# Altium PCB PCB1.PcbDoc (part 2 of 3)
Units mm, origin at the board's own origin, x right, y up, seen from the top; angles counter-clockwise.
Board outline 312.67 x 198.63 mm, 2 copper layers (Top Layer, Bottom Layer); 142 components, 324 nets, 969 pads, 386 vias.
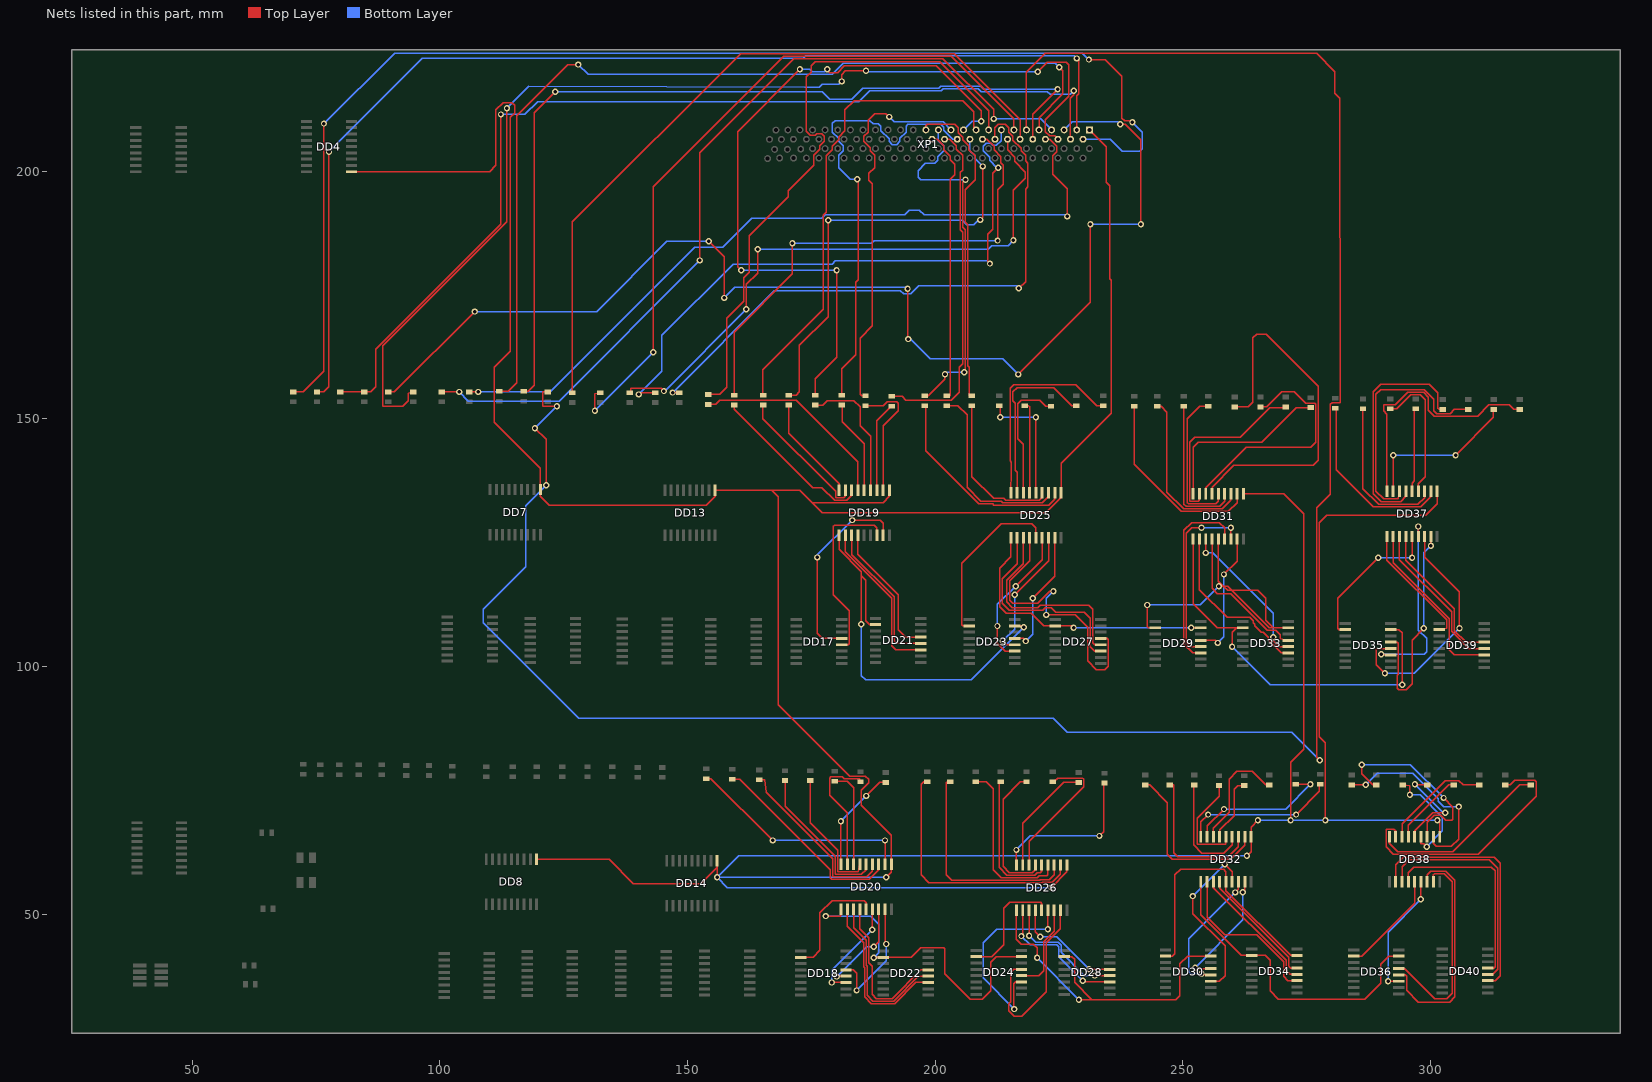
[diagram p2: the nets of this part, all layers, seen from the top]

## Via types
v1: diameter 1.27, hole 0.711, Top Layer to Bottom Layer, 386 vias

## Nets (pads, with @x,y where several pads share a name; then routed paths per layer and width w, separated by ;. In a path a pad name is that pad's centre, name@x,y a point inside that pad or via, vN(x,y) a via of type N, cw(c..) or ccw(c..) an arc to the next point about the centre after c; other vN are vias at no path point) (continued)
NetDD17_12: DD17.12 DD19.7 | length 37.3
  Top Layer w0.254: DD17.12@181.102,104.394 182.423,104.394 182.651,104.623 182.651,111.252 179.4,114.503 179.4,128.27 179.68,128.549 187.678,128.549 188.211,128.016 DD19.7@188.211,126.514
NetDD17_13: DD17.13 DD19.8 | length 40
  Top Layer w0.254: v1(176.2,122.022) 176.2,106.68 177.216,105.664 DD17.13@181.102,105.664 ; v1(183.236,129.565) 183.286,129.515 188.9,129.515 189.481,128.933 DD19.8@189.481,126.514
  Bottom Layer w0.254: v1(176.2,122.022) 176.2,122.53 v1(183.236,129.565)
NetDD18_2: DD18.2 DD20.5 | length 24
  Top Layer w0.254: DD18.2@172.847,41.275 175.336,41.275 176.733,42.672 176.733,50.292 179.172,52.73 185.674,52.73 186.058,52.346 DD20.5@186.058,50.949
NetDD18_11: DD18.11 DD20.6 | length 21.1
  Top Layer w0.254: v1(179.099,36.195) DD18.11@181.997,36.195 ; v1(187.274,46.838) 187.328,46.891 DD20.6@187.328,50.949
  Bottom Layer w0.254: v1(179.099,36.195) 179.099,38.663 v1(187.274,46.838)
NetDD18_12: DD18.12 DD20.7 | length 19.8
  Top Layer w0.254: v1(180.111,37.389) 180.188,37.465 DD18.12@181.997,37.465 ; v1(187.604,43.434) 188.598,44.428 DD20.7@188.598,50.949
  Bottom Layer w0.254: v1(180.111,37.389) 186.157,43.434 v1(187.604,43.434)
NetDD18_13: DD18.13 DD20.8 | length 24.8
  Top Layer w0.254: DD18.13@181.997,38.735 183.49,38.735 184.125,38.1 v1(184.125,34.595) ; DD20.8@189.868,50.949 189.868,44.218 v1(190.119,43.967)
  Bottom Layer w0.254: v1(184.125,34.595) 190.119,40.589 v1(190.119,43.967)
NetDD19_1: DD19.1 DD21.2 DD23.15 | length 81.5
  Top Layer w0.254: DD19.1@180.591,126.514 180.591,123.678 185.09,119.179 185.09,118.285 ; v1(185.09,108.534) 185.09,118.285 ; DD21.2@187.954,108.458 186.766,108.458 186.004,109.22 186.004,117.37 185.09,118.285 ; DD23.15@216.027,108.204 217.653,108.204 v1(217.907,107.95)
  Bottom Layer w0.254: v1(185.09,108.534) 185.09,98.136 185.936,97.29 207.247,97.29 v1(217.907,107.95)
NetDD19_2: DD19.2 DD21.11 | length 32.4
  Top Layer w0.254: DD19.2@181.861,126.514 181.861,123.121 191.182,113.8 191.182,104.22 192.024,103.378 DD21.11@197.104,103.378
NetDD19_3: DD19.3 DD21.12 | length 30.5
  Top Layer w0.254: DD19.3@183.131,126.514 183.131,122.607 191.694,114.045 191.694,105.156 192.202,104.648 DD21.12@197.104,104.648
NetDD19_4: DD19.4 DD21.13 | length 27.6
  Top Layer w0.254: DD19.4@184.401,126.514 184.401,122.645 192.532,114.514 192.532,107.442 194.056,105.918 DD21.13@197.104,105.918
NetDD19_11: DD19.11 R35.1 | length 25.8
  Top Layer w0.254: R35.1@185.925,152.67 189.543,152.67 190.289,153.416 192.278,153.416 192.532,153.162 192.532,151.638 189.481,148.587 DD19.11@189.481,135.614
NetDD19_12: DD19.12 R37.1 | length 18.3
  Top Layer w0.254: DD19.12@188.211,135.614 188.211,149.619 191.135,152.543 R37.1@191.259,152.543
NetDD19_13: DD19.13 R39.1 | length 27.6
  Top Layer w0.254: R39.1@175.765,152.797 177.292,152.797 178.165,153.67 183.591,153.67 184.861,152.4 184.861,148.565 186.941,146.485 DD19.13@186.941,135.614
NetDD19_14: DD19.14 R41.1 | length 19.2
  Top Layer w0.254: R41.1@181.099,152.797 181.28,152.797 181.28,149.377 185.671,144.986 DD19.14@185.671,135.614
NetDD19_15: DD19.15 R43.1 | length 41.5
  Top Layer w0.254: R43.1@154.175,152.924 155.642,152.924 156.515,153.797 171.933,153.797 184.401,141.329 DD19.15@184.401,135.614
NetDD19_16: DD19.16 R45.1 | length 33.6
  Top Layer w0.254: R45.1@159.398,152.797 159.385,152.797 159.385,151.968 175.235,136.119 177.14,136.119 179.676,133.583 182.093,133.583 183.131,134.621 DD19.16@183.131,135.614
NetDD19_17: DD19.17 R47.1 | length 28.1
  Top Layer w0.254: R47.1@165.24,152.797 165.227,152.797 165.227,150.063 179.908,135.382 179.908,134.087 181.582,134.087 181.861,134.366 DD19.17@181.861,135.614
NetDD19_18: DD19.18 R49.1 | length 21.4
  Top Layer w0.254: R49.1@170.431,152.797 170.409,152.797 170.409,147.088 180.591,136.906 DD19.18@180.591,135.614
NetDD20_1: DD20.1 DD22.2 DD24.15 | length 67.8
  Top Layer w0.254: v1(177.902,49.606) 180.978,49.606 DD20.1@180.978,50.949 ; v1(187.604,41.199) 187.681,41.275 DD22.2@189.484,41.275 195.157,41.275 197.104,43.222 201.725,43.222 201.904,43.043 201.904,37.948 207.035,32.817 209.474,32.817 211.201,34.544 211.201,40.259 212.344,41.402 DD24.15@217.43,41.402
  Bottom Layer w0.254: v1(177.902,49.606) 186.944,49.606 188.616,47.934 188.616,42.211 v1(187.604,41.199)
NetDD20_2: DD20.2 DD22.11 | length 34.3
  Top Layer w0.254: DD20.2@182.248,50.949 182.248,47.555 185.584,44.219 185.584,39.345 185.75,39.179 185.75,33.308 187.106,31.952 191.845,31.952 196.088,36.195 DD22.11@198.634,36.195
NetDD20_3: DD20.3 DD22.12 | length 33.4
  Top Layer w0.254: DD20.3@183.518,50.949 183.518,47.293 186.088,44.723 186.088,39.674 186.254,39.508 186.254,33.634 187.431,32.456 191.618,32.456 196.626,37.465 DD22.12@198.634,37.465
NetDD20_4: DD20.4 DD22.13 | length 32.3
  Top Layer w0.254: DD20.4@184.788,50.949 184.788,47.07 186.592,45.265 186.592,40.178 187.262,39.508 187.262,33.828 188.13,32.961 191.33,32.961 197.104,38.735 DD22.13@198.634,38.735
NetDD20_11: DD20.11 R36.1 | length 46
  Top Layer w0.254: R36.1@153.816,77.359 154.721,77.359 v1(167.208,64.872) ; DD20.11@189.868,60.049 v1(189.868,64.872)
  Bottom Layer w0.254: v1(167.208,64.872) v1(189.868,64.872)
NetDD20_12: DD20.12 R38.1 | length 40.9
  Top Layer w0.254: R38.1@159.007,77.232 160.503,77.232 178.777,58.958 178.777,57.303 179.07,57.01 186.679,57.01 188.598,58.929 DD20.12@188.598,60.049
NetDD20_13: DD20.13 R40.1 | length 36.2
  Top Layer w0.254: R40.1@164.468,77.105 165.608,77.105 165.862,74.594 179.281,61.175 179.281,57.514 186.168,57.514 187.328,58.674 DD20.13@187.328,60.049
NetDD20_14: DD20.14 R42.1 | length 30.9
  Top Layer w0.254: R42.1@169.675,76.978 169.697,76.978 169.697,71.801 179.785,61.714 179.785,58.018 185.097,58.018 186.058,58.979 DD20.14@186.058,60.049
NetDD20_15: DD20.15 R44.1 | length 26.5
  Top Layer w0.254: R44.1@174.755,76.978 174.752,76.978 174.752,68.428 180.289,62.89 180.289,58.522 184.437,58.522 DD20.15@184.788,60.049
NetDD20_16: DD20.16 R46.1 | length 19.8
  Top Layer w0.254: R46.1@179.708,76.851 182.202,76.851 183.518,75.535 DD20.16@183.518,60.049
NetDD20_17: DD20.17 R48.1 | length 26.1
  Top Layer w0.254: DD20.17@182.248,60.049 182.248,70.46 178.664,74.044 178.664,77.47 178.918,77.724 181.254,77.724 181.61,77.368 184.734,77.368 184.734,76.724 R48.1@184.915,76.724
NetDD20_18: DD20.18 R50.1 | length 21
  Top Layer w0.254: DD20.18@180.978,60.049 v1(180.978,68.761) ; v1(186.08,73.863) 188.814,76.597 R50.1@189.995,76.597
  Bottom Layer w0.254: v1(180.978,68.761) v1(186.08,73.863)
NetDD23_2: DD23.2 DD25.5 | length 34.7
  Top Layer w0.254: DD23.2@206.877,108.204 205.588,108.204 205.334,108.458 205.334,120.802 213.385,128.854 219.504,128.854 220.342,128.016 DD25.5@220.342,126.006
NetDD23_11: DD23.11 DD25.6 | length 29.2
  Top Layer w0.254: v1(212.573,108.179) 212.573,104.648 214.097,103.124 DD23.11@216.027,103.124 ; v1(216.256,116.23) 221.612,121.587 DD25.6@221.612,126.006
  Bottom Layer w0.254: v1(212.573,108.179) 212.573,112.547 v1(216.256,116.23)
NetDD23_12: DD23.12 DD25.7 | length 27.3
  Top Layer w0.254: v1(213.665,105.156) 214.427,104.394 DD23.12@216.027,104.394 ; v1(216.052,114.503) 222.882,121.333 DD25.7@222.882,126.006
  Bottom Layer w0.254: v1(213.665,105.156) 216.052,107.544 v1(216.052,114.503)
NetDD23_13: DD23.13 DD25.8 | length 25.8
  Top Layer w0.254: DD23.13@216.027,105.664 217.78,105.664 v1(218.313,105.131) ; v1(219.706,113.792) 224.152,118.238 DD25.8@224.152,126.006
  Bottom Layer w0.254: v1(218.313,105.131) 219.706,106.524 v1(219.706,113.792)
NetDD24_2: DD24.2 DD26.5 | length 23.5
  Top Layer w0.254: DD24.2@208.28,41.402 211.404,41.402 213.817,43.815 213.817,51.156 215.011,52.349 221.288,52.349 221.491,52.146 DD26.5@221.491,50.822
NetDD24_11: DD24.11 DD26.6 | length 41
  Top Layer w0.254: v1(215.976,30.836) 215.849,30.963 215.849,35.916 216.256,36.322 DD24.11@217.43,36.322 ; v1(222.761,46.935) DD26.6@222.761,50.822
  Bottom Layer w0.254: v1(215.976,30.836) 209.658,37.154 209.658,44.192 212.401,46.935 v1(222.761,46.935)
NetDD24_12: DD24.12 DD26.7 | length 18
  Top Layer w0.254: DD24.12@217.43,37.592 220.89,37.592 221.906,38.608 221.906,44.408 224.031,46.533 DD26.7@224.031,50.822
NetDD24_13: DD24.13 DD26.8 | length 38.1
  Top Layer w0.254: DD24.13@217.43,38.862 215.9,38.862 215.214,38.176 215.214,32.309 214.859,31.953 214.859,30.48 215.951,29.388 217.5,29.388 222.41,34.298 222.41,44.188 225.301,47.079 DD26.8@225.301,50.822
NetDD25_1: DD25.1 DD27.2 DD29.15 | length 57.2
  Top Layer w0.254: DD25.1@215.262,126.006 215.262,122.123 213.016,119.877 213.016,112.108 214.376,110.748 219.393,110.748 221.937,108.204 DD27.2@224.276,108.204 227.559,108.204 v1(227.94,107.823) ; v1(251.714,107.823) DD29.15@253.619,107.823
  Bottom Layer w0.254: v1(227.94,107.823) v1(251.714,107.823)
NetDD25_2: DD25.2 DD27.11 | length 42.1
  Top Layer w0.254: DD25.2@216.532,126.006 216.532,120.727 213.52,117.715 213.52,112.811 215.003,111.328 221.726,111.328 222.265,111.867 223.41,111.867 224.357,110.92 230.1,110.92 231.292,109.728 231.292,104.038 232.207,103.124 DD27.11@233.426,103.124
NetDD25_3: DD25.3 DD27.12 | length 41.3
  Top Layer w0.254: DD25.3@217.802,126.006 217.802,120.768 214.42,117.385 214.42,113.063 215.581,111.902 220.753,111.902 221.222,112.371 231.015,112.371 231.858,111.527 231.858,104.795 232.259,104.394 DD27.12@233.426,104.394
NetDD25_4: DD25.4 DD27.13 | length 58.3
  Top Layer w0.254: DD25.4@219.072,126.006 219.072,121.325 215.036,117.289 215.036,113.36 215.621,112.776 220.726,112.776 223.164,115.214 v1(223.876,115.214) ; v1(222.402,110.414) 228.321,110.414 230.788,107.946 230.788,101.113 232.562,99.339 234.239,99.339 234.975,100.076 234.975,105.41 234.721,105.664 DD27.13@233.426,105.664
  Bottom Layer w0.254: v1(222.402,110.414) 222.402,113.741 v1(223.876,115.214)
NetDD25_11: DD25.11 R51.1 | length 41.7
  Top Layer w0.254: R51.1@197.863,152.67 198.044,152.67 198.044,143.598 208.788,132.853 211.578,132.853 211.861,132.571 222.918,132.571 224.152,133.804 DD25.11@224.152,135.106
NetDD25_12: DD25.12 R53.1 | length 38.5
  Top Layer w0.254: R53.1@202.308,152.67 204.546,152.67 206.426,150.79 206.426,136.168 209.236,133.358 213.372,133.358 213.654,133.075 221.594,133.075 222.882,134.363 DD25.12@222.882,135.106
NetDD25_13: DD25.13 R55.1 | length 31.7
  Top Layer w0.254: R55.1@207.388,152.67 207.366,152.67 207.366,138.366 211.807,133.924 213.876,133.924 214.221,133.579 221.031,133.579 221.612,134.16 DD25.13@221.612,135.106
NetDD25_14: DD25.14 R57.1 | length 24.9
  Top Layer w0.254: R57.1@212.976,152.67 213.157,152.67 v1(213.157,150.343) ; DD25.14@220.342,135.106 v1(220.342,150.343)
  Bottom Layer w0.254: v1(213.157,150.343) v1(220.342,150.343)
NetDD25_15: DD25.15 R59.1 | length 18.4
  Top Layer w0.254: R59.1@218.056,152.67 218.802,152.67 219.072,152.4 DD25.15@219.072,135.106
NetDD25_16: DD25.16 R61.1 | length 25.9
  Top Layer w0.254: DD25.16@217.802,135.106 217.802,144.834 216.672,145.964 216.672,153.019 217.424,153.772 221.123,153.772 222.352,152.543 R61.1@223.39,152.543
NetDD25_17: DD25.17 R63.1 | length 35.3
  Top Layer w0.254: DD25.17@216.532,135.106 216.532,139.268 216.168,139.633 216.168,153.201 215.675,153.693 215.675,155.431 216.552,156.308 223.946,156.308 227.584,152.67 R63.1@228.47,152.67
NetDD25_18: DD25.18 R65.1 | length 42.1
  Top Layer w0.254: DD25.18@215.262,135.106 215.262,137.223 215.406,137.366 215.406,141.263 215.163,141.505 215.163,156.184 215.9,156.92 228.414,156.92 232.664,152.67 R65.1@233.931,152.67
NetDD26_1: DD26.1 DD28.2 DD30.15 | length 70.7
  Top Layer w0.254: DD26.1@216.411,50.822 216.411,44.958 217.427,43.942 219.812,43.942 220.574,43.18 v1(220.574,41.173) ; DD28.2@226.06,41.402 227.584,41.402 228.147,40.839 228.147,36.216 231.648,32.715 ; v1(229.032,32.715) 231.648,32.715 ; DD30.15@255.657,41.529 250.952,41.529 249.403,39.98 249.403,33.528 248.59,32.715 231.648,32.715
  Bottom Layer w0.254: v1(220.574,41.173) v1(229.032,32.715)
NetDD26_2: DD26.2 DD28.11 | length 28.2
  Top Layer w0.254: v1(217.424,45.568) 217.681,45.825 DD26.2@217.681,50.822 ; v1(229.768,36.547) 229.993,36.322 DD28.11@235.21,36.322
  Bottom Layer w0.254: v1(217.424,45.568) 219.181,43.811 224.561,43.811 224.938,43.434 224.938,41.377 v1(229.768,36.547)
NetDD26_3: DD26.3 DD28.12 | length 25.6
  Top Layer w0.254: v1(218.951,45.641) DD26.3@218.951,50.822 ; v1(232.207,37.592) DD28.12@235.21,37.592
  Bottom Layer w0.254: v1(218.951,45.641) 220.277,44.315 224.815,44.315 225.442,43.688 225.442,42.274 230.124,37.592 v1(232.207,37.592)
NetDD26_4: DD26.4 DD28.13 | length 22.5
  Top Layer w0.254: DD26.4@220.221,50.822 220.221,46.431 v1(221.237,45.415) ; v1(231.064,38.862) DD28.13@235.21,38.862
  Bottom Layer w0.254: v1(221.237,45.415) 224.511,45.415 v1(231.064,38.862)
NetDD26_11: DD26.11 R52.1 | length 51.1
  Top Layer w0.254: R52.1@198.377,76.724 197.663,76.724 197.139,76.2 197.139,57.912 198.673,56.378 221.65,56.378 221.685,56.413 223.647,56.413 225.301,58.067 DD26.11@225.301,59.922
NetDD26_12: DD26.12 R54.1 | length 44.2
  Top Layer w0.254: R54.1@203.076,76.724 202.387,76.724 202.277,76.614 202.277,57.912 203.306,56.882 221.146,56.882 221.185,56.921 223.04,56.921 224.031,57.912 DD26.12@224.031,59.922
NetDD26_13: DD26.13 R56.1 | length 34.4
  Top Layer w0.254: R56.1@208.156,76.724 210.312,76.724 211.76,75.276 211.76,58.928 213.301,57.387 220.642,57.387 220.99,57.734 222.558,57.734 222.761,57.937 DD26.13@222.761,59.922
NetDD26_14: DD26.14 R58.1 | length 28.4
  Top Layer w0.254: R58.1@213.236,76.724 212.903,76.724 212.903,59.436 214.448,57.891 220.142,57.891 220.646,58.395 221.234,58.395 221.491,58.652 DD26.14@221.491,59.922
NetDD26_15: DD26.15 R60.1 | length 28
  Top Layer w0.254: R60.1@218.443,76.724 217.195,76.724 213.716,73.244 213.716,59.639 214.96,58.395 219.634,58.395 220.221,58.982 DD26.15@220.221,59.922
NetDD26_16: DD26.16 R62.1 | length 28.6
  Top Layer w0.254: DD26.16@218.951,59.922 218.951,64.685 230.011,75.745 230.011,77.304 229.845,77.47 224.698,77.47 223.952,76.724 R62.1@223.777,76.724
NetDD26_17: DD26.17 R64.1 | length 23.1
  Top Layer w0.254: DD26.17@217.681,59.922 217.681,68.304 225.974,76.597 R64.1@228.984,76.597
NetDD26_18: DD26.18 R66.1 | length 32.2
  Top Layer w0.254: DD26.18@216.411,59.922 v1(216.411,62.97) ; v1(233.172,65.786) 234.01,66.624 234.01,76.47 R66.1@234.191,76.47
  Bottom Layer w0.254: v1(216.411,62.97) 219.227,65.786 v1(233.172,65.786)
NetDD29_2: DD29.2 DD31.5 DD33.15 | length 65.7
  Top Layer w0.254: v1(242.824,112.42) 242.824,108.077 243.078,107.823 DD29.2@244.469,107.823 ; DD31.5@257.172,125.752 257.172,117.221 258.188,116.205 ; v1(257.302,116.205) 258.188,116.205 ; DD33.15@271.272,107.823 268.224,107.823 ; 258.188,116.205 259.08,116.205 259.92,115.365 ; 258.188,116.205 259.028,115.365 259.92,115.365 ; 259.92,115.365 265.177,115.365 266.751,113.792 266.751,109.296 268.224,107.823 ; 259.92,115.365 267.462,107.823 268.224,107.823
  Bottom Layer w0.254: v1(242.824,112.42) 253.517,112.42 v1(257.302,116.205)
NetDD29_11: DD29.11 DD31.6 | length 38.7
  Top Layer w0.254: DD29.11@253.619,102.743 251.968,102.743 250.19,104.521 250.19,127.483 251.761,129.053 257.405,129.053 258.442,128.016 DD31.6@258.442,125.752
NetDD29_12: DD29.12 DD31.7 | length 37.2
  Top Layer w0.254: DD29.12@253.619,104.013 251.435,104.013 250.698,104.75 250.698,126.924 251.816,128.041 v1(253.771,128.041) ; DD31.7@259.712,125.752 v1(259.712,128.041)
  Bottom Layer w0.254: v1(253.771,128.041) v1(259.712,128.041)
NetDD29_13: DD29.13 DD31.8 | length 26.3
  Top Layer w0.254: DD29.13@253.619,105.283 256.515,105.283 v1(257.048,104.75) ; v1(258.314,118.589) 260.982,121.257 DD31.8@260.982,125.752
  Bottom Layer w0.254: v1(257.048,104.75) 258.314,106.016 v1(258.314,118.589)
NetDD30_2: DD30.2 DD32.5 DD34.15 | length 52.6
  Top Layer w0.254: DD30.2@246.507,41.529 247.904,41.529 248.412,42.037 248.412,57.912 249.559,59.059 258.238,59.059 258.702,58.595 DD32.5@258.702,56.537 258.702,54.745 271.791,41.656 DD34.15@273.056,41.656
NetDD30_11: DD30.11 DD32.6 | length 35.4
  Top Layer w0.254: v1(252.019,53.645) 252.019,50.114 258.547,43.586 258.547,37.592 257.404,36.449 DD30.11@255.657,36.449 ; v1(258.445,60.071) 259.972,58.544 DD32.6@259.972,56.537
  Bottom Layer w0.254: v1(252.019,53.645) v1(258.445,60.071)
NetDD30_12: DD30.12 DD32.7 | length 27
  Top Layer w0.254: v1(253.771,37.973) 254.025,37.719 DD30.12@255.657,37.719 ; v1(260.604,54.378) 261.242,55.016 DD32.7@261.242,56.537
  Bottom Layer w0.254: v1(253.771,37.973) 251.612,37.973 251.231,38.354 251.231,45.006 v1(260.604,54.378)
NetDD30_13: DD30.13 DD32.8 | length 24.7
  Top Layer w0.254: v1(252.501,39.192) 252.705,38.989 DD30.13@255.657,38.989 ; v1(262.128,54.404) 262.512,54.788 DD32.8@262.512,56.537
  Bottom Layer w0.254: v1(252.501,39.192) 262.128,48.819 v1(262.128,54.404)
NetDD31_1: DD31.1 DD33.2 DD35.15 | length 79.9
  Top Layer w0.254: DD31.1@252.092,125.752 252.092,112.703 256.972,107.823 260.858,107.823 ; v1(259.944,104.013) 259.944,106.909 260.858,107.823 ; DD33.2@262.122,107.823 260.858,107.823 ; DD35.15@291.973,107.442 293.624,107.442 294.284,106.782 v1(294.284,96.317)
  Bottom Layer w0.254: v1(259.944,104.013) 267.64,96.317 v1(294.284,96.317)
NetDD31_2: DD31.2 DD33.11 | length 34.1
  Top Layer w0.254: DD31.2@253.362,125.752 253.362,115.478 258.943,109.897 263.534,109.897 264.183,109.248 264.183,108.882 264.503,108.561 264.503,108.24 265.832,106.912 266.245,106.912 267.237,105.92 267.237,105.431 269.926,102.743 DD33.11@271.272,102.743
NetDD31_3: DD31.3 DD33.12 | length 30.6
  Top Layer w0.254: v1(254.632,122.936) DD31.3@254.632,125.752 ; v1(268.249,105.918) 268.249,105.156 269.392,104.013 DD33.12@271.272,104.013
  Bottom Layer w0.254: v1(254.632,122.936) 256.048,122.936 268.249,110.735 v1(268.249,105.918)
NetDD31_4: DD31.4 DD33.13 | length 30
  Top Layer w0.254: DD31.4@255.902,125.752 255.902,115.802 256.972,114.732 259.639,114.732 267.052,107.319 268.732,107.319 269.646,106.405 269.646,105.639 DD33.13@271.272,105.283
NetDD31_11: DD31.11 R67.1 | length 39
  Top Layer w0.254: R67.1@240.154,152.543 240.157,152.543 240.157,140.804 249.657,131.304 259.216,131.304 260.982,133.071 DD31.11@260.982,134.852
NetDD31_12: DD31.12 R69.1 | length 34.9
  Top Layer w0.254: R69.1@244.853,152.543 245.627,152.543 246.786,151.384 246.786,135.183 250.161,131.809 257.945,131.809 259.712,133.576 DD31.12@259.712,134.852
NetDD31_13: DD31.13 R71.1 | length 30.2
  Top Layer w0.254: R71.1@250.187,152.543 250.19,152.543 250.19,132.791 250.669,132.313 257.43,132.313 258.442,133.325 DD31.13@258.442,134.852
NetDD31_14: DD31.14 R73.1 | length 30.3
  Top Layer w0.254: R73.1@255.14,152.543 253.457,152.543 250.901,149.987 250.901,133.096 251.181,132.817 256.664,132.817 257.172,133.325 DD31.14@257.172,134.852
NetDD31_15: DD31.15 R75.1 | length 75
  Top Layer w0.254: DD31.15@255.902,134.852 255.902,136.166 260.325,140.589 276.352,140.589 277.393,141.63 277.393,156.616 266.878,167.132 264.922,167.132 264.16,166.37 264.16,153.407 263.169,152.416 R75.1@260.474,152.416
NetDD31_16: DD31.16 R77.1 | length 48.5
  Top Layer w0.254: DD31.16@254.632,134.852 254.632,136.144 262.76,144.272 275.869,144.272 276.885,145.288 276.885,152.908 276.631,153.162 274.828,153.162 272.542,155.448 269.961,155.448 266.929,152.416 R77.1@265.681,152.416
NetDD31_17: DD31.17 R79.1 | length 37.7
  Top Layer w0.254: DD31.17@253.362,134.852 253.362,133.604 253.083,133.325 251.409,133.325 251.409,145.288 252.425,146.304 261.645,146.304 267.559,152.218 270.238,152.218 270.238,152.416 R79.1@270.761,152.416
NetDD31_18: DD31.18 R81.1 | length 36.5
  Top Layer w0.254: DD31.18@252.092,134.852 252.092,144.272 253.108,145.288 265.922,145.288 272.923,152.289 R81.1@275.841,152.289
NetDD32_1: DD32.1 DD34.2 DD36.15 | length 63.2
  Top Layer w0.254: DD32.1@253.622,56.537 253.622,49.857 261.823,41.656 DD34.2@263.906,41.656 266.598,41.656 267.614,40.64 267.614,34.48 269.24,32.855 286.728,32.855 289.924,36.051 289.924,39.861 291.592,41.529 DD36.15@293.63,41.529
NetDD32_2: DD32.2 DD34.11 | length 32.4
  Top Layer w0.254: DD32.2@254.892,56.537 254.892,49.324 258.42,45.796 264.948,45.796 270.332,40.411 270.332,37.45 271.207,36.576 DD34.11@273.056,36.576
NetDD32_3: DD32.3 DD34.12 | length 26.5
  Top Layer w0.254: DD32.3@256.162,56.537 256.162,55.366 270.886,40.642 270.886,38.608 271.648,37.846 DD34.12@273.056,37.846
NetDD32_4: DD32.4 DD34.13 | length 24.6
  Top Layer w0.254: DD32.4@257.432,56.537 257.432,55.206 271.39,41.248 271.39,39.506 271.78,39.116 DD34.13@273.056,39.116
NetDD32_11: DD32.11 R68.1 | length 35.3
  Top Layer w0.254: R68.1@242.446,76.089 243.332,76.089 246.888,72.533 246.888,62.099 247.904,61.083 259.711,61.083 262.512,63.884 DD32.11@262.512,65.637
NetDD32_12: DD32.12 R70.1 | length 30.7
  Top Layer w0.254: R70.1@247.399,76.089 248.133,76.089 248.133,62.433 248.979,61.587 259.193,61.587 261.242,63.637 DD32.12@261.242,65.637
NetDD32_13: DD32.13 R72.1 | length 23.1
  Top Layer w0.254: R72.1@252.352,76.089 252.171,76.089 252.171,64.008 253.873,62.306 258.27,62.306 259.972,64.008 DD32.13@259.972,65.637
NetDD32_14: DD32.14 R74.1 | length 21
  Top Layer w0.254: R74.1@257.305,75.962 257.327,75.962 257.327,73.801 252.933,69.407 252.933,64.11 258.702,64.11 DD32.14@258.702,65.637
NetDD32_15: DD32.15 R76.1 | length 13.1
  Top Layer w0.254: DD32.15@257.432,65.637 257.432,67.002 260.342,69.912 260.342,75.192 261.112,75.962 R76.1@262.385,75.962
NetDD32_16: DD32.16 R78.1 | length 22.8
  Top Layer w0.254: DD32.16@256.162,65.637 256.162,67.377 259.334,70.549 259.334,77.216 260.934,78.816 263.973,78.816 266.7,76.089 R78.1@267.465,76.089
NetDD32_17: DD32.17 R80.1 | length 29.5
  Top Layer w0.254: DD32.17@254.892,65.637 254.892,67.796 v1(258.318,71.222) ; R80.1@272.799,76.216 v1(275.768,76.216)
  Bottom Layer w0.254: v1(258.318,71.222) 270.773,71.222 v1(275.768,76.216)
NetDD32_18: DD32.18 R82.1 | length 31.1
  Top Layer w0.254: DD32.18@253.622,65.637 253.622,68.634 v1(255.092,70.104) ; v1(272.872,70.104) 277.571,74.803 277.571,76.216 R82.1@277.752,76.216
  Bottom Layer w0.254: v1(255.092,70.104) v1(272.872,70.104)
NetDD35_2: DD35.2 DD37.5 | length 30.4
  Top Layer w0.254: DD35.2@282.823,107.442 281.534,107.442 281.28,107.696 281.28,113.792 v1(289.458,121.971) ; v1(296.288,121.971) DD37.5@296.288,126.26
  Bottom Layer w0.254: v1(289.458,121.971) v1(296.288,121.971)
NetDD35_11: DD35.11 DD37.6 | length 39.2
  Top Layer w0.254: v1(290.093,102.464) 290.195,102.362 DD35.11@291.973,102.362 ; DD37.6@297.558,126.26 297.558,128.267 v1(297.561,128.27)
  Bottom Layer w0.254: v1(290.093,102.464) 298.704,102.464 299.212,102.972 299.212,105.689 297.561,107.34 v1(297.561,128.27)
NetDD35_12: DD35.12 DD37.7 | length 48.8
  Top Layer w0.254: v1(290.805,98.628) 289.081,100.351 289.081,103.458 289.255,103.632 DD35.12@291.973,103.632 ; DD37.7@298.828,126.26 298.828,122.101 305.867,115.062 v1(305.867,107.721)
  Bottom Layer w0.254: v1(290.805,98.628) 296.774,98.628 v1(305.867,107.721)
NetDD35_13: DD35.13 DD37.8 | length 45.7
  Top Layer w0.254: DD35.13@291.973,104.902 293.268,104.902 293.522,104.648 293.522,98.476 293.268,98.222 293.268,95.656 293.624,95.301 295.072,95.301 296.291,96.52 296.291,105.334 v1(298.653,107.696) ; v1(300.098,124.384) DD37.8@300.098,126.26
  Bottom Layer w0.254: v1(298.653,107.696) 298.653,122.939 v1(300.098,124.384)
NetDD36_2: DD36.2 DD38.5 | length 21.1
  Top Layer w0.254: DD36.2@284.48,41.529 286.109,41.529 296.802,52.222 DD38.5@296.802,56.537
NetDD36_11: DD36.11 DD38.6 | length 25
  Top Layer w0.254: v1(291.44,36.449) DD36.11@293.63,36.449 ; v1(298.072,53.013) DD38.6@298.072,56.537
  Bottom Layer w0.254: v1(291.44,36.449) 291.44,46.38 v1(298.072,53.013)
NetDD36_12: DD36.12 DD38.7 | length 47.3
  Top Layer w0.254: DD36.12@293.63,37.719 294.894,37.719 295.173,37.44 295.173,34.646 297.586,32.233 303.86,32.233 304.922,33.295 304.922,56.875 303.102,58.695 300.072,58.695 299.342,57.966 DD38.7@299.342,56.537
NetDD36_13: DD36.13 DD38.8 | length 42.3
  Top Layer w0.254: DD36.13@293.63,38.989 294.843,38.989 300.914,32.918 303.327,32.918 304.418,34.01 304.418,56.541 302.768,58.191 300.891,58.191 300.612,57.912 DD38.8@300.612,56.537
NetDD37_1: DD37.1 DD39.2 | length 25.1
  Top Layer w0.254: DD37.1@291.208,126.26 291.208,121.463 303.273,109.398 303.273,107.696 DD39.2@301.746,107.442
NetDD37_2: DD37.2 DD39.11 | length 35.1
  Top Layer w0.254: DD37.2@292.478,126.26 292.478,120.906 303.777,109.607 303.777,103.385 304.8,102.362 DD39.11@310.896,102.362
NetDD37_3: DD37.3 DD39.12 | length 31.6
  Top Layer w0.254: DD37.3@293.748,126.26 293.748,121.548 304.281,111.015 304.281,107.104 307.753,103.632 DD39.12@310.896,103.632
NetDD37_4: DD37.4 DD39.13 | length 30.1
  Top Layer w0.254: DD37.4@295.018,126.26 295.018,121.466 304.851,111.633 304.851,107.264 307.213,104.902 DD39.13@310.896,104.902
NetDD37_11: DD37.11 R83.1 | length 36.7
  Top Layer w0.254: R83.1@280.81,152.162 280.975,152.162 280.975,139.755 288.493,132.236 298.019,132.236 300.098,134.315 DD37.11@300.098,135.36
NetDD37_12: DD37.12 R85.1 | length 31.7
  Top Layer w0.254: R85.1@286.382,152.035 286.36,152.035 286.36,135.941 289.56,132.74 297.456,132.74 298.828,134.112 DD37.12@298.828,135.36
NetDD37_13: DD37.13 R87.1 | length 27.8
  Top Layer w0.254: R87.1@291.843,152.035 293.157,152.035 296.009,154.887 297.942,154.887 298.983,153.846 298.983,138.331 297.558,136.906 DD37.13@297.558,135.36
NetDD37_14: DD37.14 R89.1 | length 17.2
  Top Layer w0.254: DD37.14@296.288,135.36 296.288,136.982 296.774,137.468 296.774,152.035 R89.1@297.05,152.035
NetDD37_15: DD37.15 R91.1 | length 47.8
  Top Layer w0.254: DD37.15@295.018,135.36 295.018,134.341 293.977,133.299 290.068,133.299 288.462,134.905 288.462,155.44 289.998,156.976 299.74,156.976 301.473,155.243 301.473,152.187 301.752,151.908 R91.1@302.511,151.908
NetDD37_16: DD37.16 R93.1 | length 49
  Top Layer w0.254: DD37.16@293.748,135.36 293.469,133.833 290.525,133.833 288.966,135.392 288.966,154.936 289.935,155.905 298.801,155.905 300.704,154.003 300.704,151.62 301.269,151.054 303.987,151.054 304.841,151.908 R93.1@307.591,151.908
NetDD37_17: DD37.17 R95.1 | length 32.4
  Top Layer w0.254: DD37.17@292.478,135.36 v1(292.478,142.672) ; v1(305.079,142.672) 312.699,150.292 312.699,151.908 R95.1@312.798,151.908
  Bottom Layer w0.254: v1(292.478,142.672) v1(305.079,142.672)
NetDD37_18: DD37.18 R97.1 | length 51.1
  Top Layer w0.254: DD37.18@291.208,135.36 291.208,150.981 290.576,151.613 290.576,152.809 290.654,152.887 292.887,152.887 295.391,155.391 298.602,155.391 299.584,154.409 299.584,151.698 300.736,150.546 309.524,150.546 311.785,152.806 315.925,152.806 316.824,151.908 R97.1@318.005,151.908
NetDD38_2: DD38.2 DD40.11 | length 51.3
  Top Layer w0.254: DD38.2@292.992,56.537 292.992,59.944 294.491,61.443 312.928,61.443 314.096,60.274 314.096,37.592 313.08,36.576 DD40.11@311.537,36.576
NetDD38_3: DD38.3 DD40.12 | length 46.5
  Top Layer w0.254: DD38.3@294.262,56.537 294.262,59.541 295.656,60.935 311.912,60.935 313.588,59.258 313.588,38.862 312.572,37.846 DD40.12@311.537,37.846
NetDD38_4: DD38.4 DD40.13 | length 41.2
  Top Layer w0.254: DD38.4@295.532,56.537 295.532,58.375 296.672,59.515 312.29,59.515 313.08,58.725 313.08,39.37 312.826,39.116 DD40.13@311.537,39.116
NetDD38_11: DD38.11 R84.1 | length 39.5
  Top Layer w0.254: R84.1@284.118,76.089 286.909,76.089 v1(286.918,76.098) ; DD38.11@300.612,65.637 300.612,64.262 301.196,63.678 304.216,63.678 305.689,65.151 v1(305.689,71.73)
  Bottom Layer w0.254: v1(286.918,76.098) 289.281,78.461 296.443,78.461 301.625,73.279 301.625,72.822 302.717,71.73 v1(305.689,71.73)
NetDD38_12: DD38.12 R86.1 | length 39.2
  Top Layer w0.254: v1(286.156,80.188) 286.156,78.334 288.401,76.089 R86.1@289.055,76.089 ; DD38.12@299.342,65.637 299.342,68.554 300.736,69.948 302.082,69.948 303.094,68.936 304.292,68.936 304.546,69.19 304.546,71.552 v1(302.641,73.457)
  Bottom Layer w0.254: v1(286.156,80.188) 295.91,80.188 v1(302.641,73.457)
NetDD38_13: DD38.13 R88.1 | length 21.9
  Top Layer w0.254: R88.1@294.389,76.089 295.863,75.882 v1(295.863,74.117) ; DD38.13@298.072,65.637 298.072,64.186 298.653,64.186 v1(299.237,63.602)
  Bottom Layer w0.254: v1(295.863,74.117) 297.913,74.117 302.434,69.596 302.434,66.798 v1(299.237,63.602)
NetDD38_14: DD38.14 R90.1 | length 19.9
  Top Layer w0.254: DD38.14@296.802,65.637 296.802,66.856 300.444,70.498 v1(302.984,70.498) ; v1(296.875,76.206) 296.992,76.089 R90.1@299.342,76.089
  Bottom Layer w0.254: v1(296.875,76.206) 302.583,70.498 v1(302.984,70.498)
NetDD38_15: DD38.15 R92.1 | length 14.8
  Top Layer w0.254: DD38.15@295.532,65.637 295.532,67.945 303.676,76.089 R92.1@304.676,76.089
NetDD38_16: DD38.16 R94.1 | length 22.2
  Top Layer w0.254: DD38.16@294.262,65.637 294.262,68.281 302.943,76.962 305.714,76.962 306.587,76.089 R94.1@309.883,76.089
NetDD38_17: DD38.17 R96.1 | length 52.3
  Top Layer w0.254: DD38.17@292.992,65.637 292.992,66.802 292.611,67.183 291.033,67.183 291.033,63.576 292.524,62.086 309.609,62.086 321.335,73.812 321.335,76.733 321.056,77.013 317.068,77.013 316.144,76.089 R96.1@315.09,76.089
NetDD38_18: DD38.18 R98.1 | length 36.2
  Top Layer w0.254: DD38.18@291.722,65.637 291.722,64.262 293.394,62.59 304.509,62.59 318.008,76.089 R98.1@320.297,76.089
XP1-1: DD4.10 DD7.10 DD8.10 DD13.10 DD14.10 DD19.10 DD20.10 DD25.10 DD26.10 DD31.10 DD32.10 DD37.10 DD38.10 XP1.1 | length 903.8
  Top Layer w0.254: DD4.10@82.147,199.898 110.033,199.898 111.303,201.168 111.303,212.395 112.776,213.868 114.55,213.868 115.058,213.36 115.058,211.738 114.198,210.879 114.198,163.652 110.973,160.426 110.973,149.352 120.266,140.059 DD7.10@120.266,135.741 120.266,134.369 122.06,132.575 153.784,132.575 155.572,134.363 DD13.10@155.572,135.614 155.572,135.636 167.005,135.636 ; DD8.10@119.51,61.065 119.51,61.062 134.179,61.062 139.082,56.158 152.681,56.158 155.959,59.436 ; v1(155.959,57.455) 155.959,59.436 ; DD14.10@155.959,60.811 155.959,59.436 ; v1(190.119,57.455) 191.138,58.474 DD20.10@191.138,60.049 191.138,65.885 185.064,71.958 185.064,75.006 186.563,76.505 186.563,77.237 185.928,77.872 182.707,77.872 168.326,92.253 168.326,134.315 167.005,135.636 ; DD19.10@190.751,135.614 190.751,134.341 189.481,133.071 175.209,133.071 ; v1(223.393,55.372) 226.571,58.55 DD26.10@226.571,59.922 ; XP1.1@231.127,208.367 234.573,204.921 234.573,197.776 235.235,197.115 235.235,178.249 235.534,177.949 235.534,151.146 225.422,141.034 DD25.10@225.422,135.106 225.422,134.159 222.353,131.089 177.19,131.089 175.209,133.071 ; DD31.10@262.252,134.852 270.405,134.852 274.371,130.886 274.371,83.312 271.755,80.696 v1(271.755,68.936) ; v1(262.94,61.798) 263.782,62.64 DD32.10@263.782,65.637 263.782,67.542 v1(265.176,68.936) ; v1(278.79,68.936) 278.79,84.582 277.52,85.852 277.52,129.032 279.044,130.556 299.034,130.556 301.368,132.89 DD37.10@301.368,135.36 ; v1(301.422,68.936) 301.882,68.475 DD38.10@301.882,65.637 ; 167.005,135.636 172.644,135.636 175.209,133.071
  Bottom Layer w0.254: v1(190.119,57.455) v1(155.959,57.455) ; v1(223.393,55.372) 158.042,55.372 v1(155.959,57.455) ; v1(262.94,61.798) 160.302,61.798 v1(155.959,57.455) ; v1(265.176,68.936) v1(271.755,68.936) v1(278.79,68.936) v1(301.422,68.936)
XP1-2: R3.2 XP1.2 | length 257.3
  Top Layer w0.254: R3.2@70.355,155.448 72.39,155.448 76.581,159.639 v1(76.581,209.626) ; v1(231.038,222.555) 234.34,222.555 237.668,219.227 237.668,210.748 238.252,210.164 239.543,210.164 v1(239.827,209.88)
  Bottom Layer w0.254: v1(76.581,209.626) 90.83,223.876 229.718,223.876 v1(231.038,222.555) ; XP1.2@229.857,206.462 235.334,206.462 237.783,204.013 241.3,204.013 241.859,204.572 241.859,207.848 v1(239.827,209.88)
XP1-3: R5.2 XP1.3 | length 224.3
  Top Layer w0.254: R5.2@75.181,155.448 76.581,155.448 77.597,156.464 v1(77.597,203.911) ; v1(228.575,222.783) 229.002,222.356 229.002,215.636 228.587,215.22 XP1.3@228.587,208.367
  Bottom Layer w0.254: v1(77.597,203.911) 96.469,222.783 173.389,222.783 173.903,223.297 228.061,223.297 v1(228.575,222.783)
XP1-4: R7.2 R9.2 XP1.4 | length 201.7
  Top Layer w0.254: R7.2@79.88,155.448 R9.2@84.706,155.448 86.004,155.448 87.02,156.464 87.02,164.033 112.319,189.332 v1(112.319,211.48) ; XP1.4@227.317,206.462 227.317,214.742 227.99,215.416 v1(227.99,216.23)
  Bottom Layer w0.254: v1(112.319,211.48) 117.17,211.48 119.736,214.046 184.582,214.046 186.756,216.22 201.18,216.22 201.649,216.689 208.713,216.689 209.326,216.076 222.673,216.076 223.222,215.528 227.288,215.528 v1(227.99,216.23)
XP1-5: R11.2 XP1.5 | length 244.8
  Top Layer w0.254: R11.2@89.532,155.448 90.805,155.448 v1(107.036,171.679) ; v1(154.305,185.877) 157.429,182.753 v1(157.429,174.422) ; v1(194.412,176.251) 194.412,166.268 v1(194.564,166.116) ; v1(216.764,158.979) 231.343,173.558 v1(231.343,189.281) ; v1(237.363,209.484) 238.419,209.484 241.554,206.35 v1(241.554,189.281)
  Bottom Layer w0.254: v1(107.036,171.679) 131.623,171.679 145.821,185.877 v1(154.305,185.877) ; v1(157.429,174.422) 159.563,176.555 194.107,176.555 v1(194.412,176.251) ; v1(194.564,166.116) 195.047,166.116 199.034,162.128 213.614,162.128 v1(216.764,158.979) ; XP1.5@226.047,208.367 227.712,210.033 236.815,210.033 v1(237.363,209.484) ; v1(231.343,189.281) v1(241.554,189.281)
XP1-6: R13.2 XP1.6 | length 215.8
  Top Layer w0.254: R13.2@94.612,155.448 93.574,155.194 93.574,153.695 92.456,152.578 88.494,152.578 88.494,164.77 113.538,189.814 v1(113.538,212.75) ; v1(181.127,218.135) 181.127,219.532 181.864,220.269 v1(186.03,220.269) ; v1(220.726,220.116) 222.606,221.996 226.466,221.996 226.974,221.488 226.974,215.113 222.225,210.363 222.225,207.997 223.085,207.137 224.102,207.137 XP1.6@224.777,206.462
  Bottom Layer w0.254: v1(113.538,212.75) 117.907,217.119 173.685,216.916 176.632,216.916 177.241,217.526 180.518,217.526 v1(181.127,218.135) ; v1(186.03,220.269) 186.182,220.116 v1(220.726,220.116)
XP1-7: R15.2 XP1.7 | length 172.4
  Top Layer w0.254: R15.2@100.327,155.448 v1(103.886,155.448) ; v1(152.451,181.991) 152.451,203.784 171.399,222.733 201.574,222.733 211.836,212.471 v1(211.836,210.566)
  Bottom Layer w0.254: v1(103.886,155.448) 105.74,153.594 124.054,153.594 v1(152.451,181.991) ; v1(211.836,210.566) 221.308,210.566 XP1.7@223.507,208.367
XP1-8: R17.2 XP1.8 | length 155.2
  Top Layer w0.254: R17.2@105.915,155.448 v1(107.721,155.448) ; XP1.8@222.237,206.462 223.125,206.462 224.584,205.003 224.584,203.982 223.7,203.098 223.7,199.437 226.67,196.467 v1(226.67,190.881)
  Bottom Layer w0.254: v1(107.721,155.448) 122.225,155.448 151.435,184.658 157.124,184.658 162.966,190.5 177.114,190.5 177.8,191.186 193.83,191.186 194.791,192.147 196.821,192.147 197.782,191.186 226.365,191.186 v1(226.67,190.881)
XP1-9: R19.2 XP1.9 | length 188.9
  Top Layer w0.254: R19.2@112.011,155.559 113.792,155.559 115.494,157.261 115.494,211.234 125.798,221.539 v1(127.94,221.539) ; XP1.9@220.967,208.367 220.967,210.853 225.73,215.617 225.73,220.292 v1(225.042,220.98)
  Bottom Layer w0.254: v1(127.94,221.539) 129.923,219.555 173.274,219.555 173.331,219.612 179.226,219.612 181.398,221.785 224.237,221.785 v1(225.042,220.98)
XP1-10: R21.2 XP1.10 | length 179.2
  Top Layer w0.254: R21.2@116.964,155.559 117.856,155.559 119.075,156.778 119.075,211.861 v1(123.292,216.078) ; XP1.10@219.697,206.462 219.697,211.523 v1(224.714,216.54)
  Bottom Layer w0.254: v1(123.292,216.078) 177.228,216.078 178.748,214.558 183.181,214.558 185.347,216.724 200.676,216.724 201.145,217.193 209.217,217.193 209.83,216.58 224.673,216.58 v1(224.714,216.54)
XP1-11: R23.2 XP1.11 | length 458.8
  Top Layer w0.254: v1(119.177,148.133) 121.463,145.847 v1(121.463,136.576) ; R23.2@121.79,155.432 120.752,155.432 120.752,152.578 v1(123.622,152.578) ; XP1.11@218.427,208.367 218.427,219.976 222.25,223.799 277.012,223.799 280.721,220.091 280.721,215.798 281.737,214.782 281.838,158.293 281.838,153.289 280.162,153.289 279.781,152.908 279.781,134.794 277.016,132.028 277.016,81.683 v1(277.647,81.051)
  Bottom Layer w0.254: v1(119.177,148.133) v1(123.622,152.578) ; v1(121.463,136.576) 117.323,132.436 117.323,120.193 108.712,111.582 108.712,108.787 127.989,89.51 223.876,89.51 226.67,86.716 271.983,86.716 v1(277.647,81.051)
XP1-12: R25.2 XP1.12 | length 148.5
  Top Layer w0.254: R25.2@126.743,155.305 126.721,155.305 126.721,189.763 160.706,223.749 203.81,223.749 217.157,210.402 XP1.12@217.157,206.462
XP1-13: R27.2 XP1.13 | length 145.7
  Top Layer w0.254: v1(131.293,151.663) 131.293,155.026 R27.2@132.331,155.305 ; v1(143.078,163.449) 143.078,196.85 169.469,223.241 203.276,223.241 215.887,210.63 XP1.13@215.887,208.367
  Bottom Layer w0.254: v1(131.293,151.663) v1(143.078,163.449)
XP1-14: R29.2 XP1.14 | length 119.9
  Top Layer w0.254: R29.2@138.3,155.305 138.481,155.305 138.481,156.185 144.678,156.185 v1(145.237,155.626) ; v1(161.874,172.11) 161.874,177.146 164.16,179.432 v1(164.16,184.226) ; XP1.14@214.617,206.462 214.617,204.304 216.078,202.843 216.078,201.981 218.233,199.826 218.233,198.607 215.804,196.178 v1(215.804,186.086)
  Bottom Layer w0.254: v1(145.237,155.626) 145.39,155.626 v1(161.874,172.11) ; v1(164.16,184.226) 210.676,184.226 211.434,184.984 214.702,184.984 v1(215.804,186.086)
XP1-15: R31.2 XP1.15 | length 122.8
  Top Layer w0.254: v1(140.157,154.94) 140.522,155.305 R31.2@143.507,155.305 ; v1(211.049,181.356) 210.574,181.831 210.574,187.257 211.646,188.329 211.646,199.607 v1(212.75,200.711)
  Bottom Layer w0.254: v1(140.157,154.94) 144.831,159.614 144.831,166.903 159.182,181.254 179.213,181.254 179.857,181.899 210.506,181.899 v1(211.049,181.356) ; v1(212.75,200.711) 212.471,200.711 210.998,202.184 210.998,202.843 209.728,204.113 209.728,205.001 210.36,205.634 211.253,205.634 211.655,205.232 212.37,205.232 213.347,206.209 XP1.15@213.347,208.367
XP1-16: R33.2 XP1.16 | length 121.4
  Top Layer w0.254: v1(146.964,155.321) 146.98,155.305 R33.2@148.333,155.305 ; XP1.16@212.077,206.462 212.077,208.788 212.737,209.448 214.147,209.448 214.808,208.788 214.808,207.923 215.697,207.034 215.697,206.27 217.35,204.617 217.35,204.111 218.237,203.224 218.237,202.143 218.737,201.643 218.737,196.876 218.237,196.376 218.237,177.724 v1(216.891,176.378)
  Bottom Layer w0.254: v1(146.964,155.321) 167.513,175.87 192.98,175.87 193.619,175.231 195.094,175.231 196.723,176.86 216.408,176.86 v1(216.891,176.378)
XP1-17: R43.2 XP1.17 | length 125.2
  Top Layer w0.254: R43.2@154.175,154.924 156.464,154.924 157.912,156.372 157.912,170.282 161.366,173.736 161.366,178.454 162.49,179.578 162.49,187.02 170.282,194.811 170.282,196.037 175.438,201.193 175.438,203.2 176.71,204.472 176.71,205.132 177.594,206.016 177.594,207.037 177.091,207.539 176.07,207.539 175.821,207.29 174.8,207.29 173.99,208.1 173.99,219.058 174.926,219.993 174.926,221.306 175.768,222.148 200.889,222.148 210.807,212.23 XP1.17@210.807,208.367
XP1-18: R45.2 XP1.18 | length 100.4
  Top Layer w0.254: R45.2@159.398,154.797 159.385,154.797 159.385,167.513 171.186,179.314 v1(171.186,185.449) ; XP1.18@209.537,206.462 210.425,206.462 211.884,205.003 211.884,204.368 213.28,202.972 213.28,201.722 213.788,201.214 213.788,197.362 212.654,196.229 212.654,186.061 v1(212.598,186.004)
  Bottom Layer w0.254: v1(171.186,185.449) 187.092,185.449 187.647,186.004 v1(212.598,186.004)
XP1-19: R47.2 XP1.19 | length 96.3
  Top Layer w0.254: R47.2@165.24,154.797 165.227,154.797 165.227,159.911 177.423,172.107 177.423,191.145 177.978,191.7 177.978,203.098 179.248,204.368 179.248,205.052 180.52,206.324 180.52,206.908 181.788,208.176 181.788,212.395 183.617,214.224 205.613,214.224 207.776,212.061 207.776,208.367 XP1.19@208.267,208.367
XP1-20: R49.2 XP1.20 | length 88.6
  Top Layer w0.254: R49.2@170.431,154.797 171.942,154.797 172.593,155.448 172.593,164.821 178.435,170.663 v1(178.435,190.121) ; v1(209.118,190.17) 209.601,190.652 v1(209.601,200.965)
  Bottom Layer w0.254: v1(178.435,190.121) 205.438,190.121 206.4,189.158 207.78,189.158 208.792,190.17 v1(209.118,190.17) ; XP1.20@206.997,206.462 206.997,204.175 208.074,203.098 208.074,202.492 v1(209.601,200.965)
XP1-21: R39.2 XP1.21 | length 140.4
  Top Layer w0.254: v1(160.833,180.01) 160.147,180.696 160.147,208.026 v1(172.695,220.574) ; R39.2@175.765,154.797 175.768,154.797 175.768,158.14 180.086,162.458 v1(180.086,180.01) ; v1(178.181,220.624) 178.181,220.472 178.714,219.939 180.289,219.939 181.635,221.285 200.228,221.285 209.296,212.217 v1(209.296,210.109)
  Bottom Layer w0.254: v1(160.833,180.01) v1(180.086,180.01) ; v1(172.695,220.574) 174.701,220.574 175.158,220.116 177.673,220.116 v1(178.181,220.624) ; XP1.21@205.727,208.367 207.468,210.109 v1(209.296,210.109)
XP1-22: R41.2 XP1.22 | length 92.5
  Top Layer w0.254: R41.2@181.099,154.797 181.102,154.797 181.102,160.122 183.947,162.966 183.947,177.597 184.455,178.105 184.455,198.196 v1(184.252,198.399)
  Bottom Layer w0.254: v1(184.252,198.399) 182.855,198.399 180.518,200.736 180.518,203.225 181.404,204.111 181.404,205.132 180.52,206.016 180.52,206.651 179.248,207.923 179.248,209.652 179.832,210.236 186.817,210.236 187.452,209.601 188.468,209.601 189.027,209.042 189.027,208.175 190.678,206.524 190.678,206.018 191.31,205.385 192.203,205.385 192.834,206.016 192.834,206.651 194.107,207.924 194.107,209.063 194.488,209.444 201.168,209.444 201.727,208.885 201.727,208.304 203.568,206.462 XP1.22@204.457,206.462
XP1-23: R35.2 XP1.23 | length 78.2
  Top Layer w0.254: R35.2@185.925,154.67 185.157,154.67 184.887,154.94 184.887,166.319 187.325,168.758 187.325,197.493 186.618,198.2 186.618,199.591 187.757,200.73 187.757,203.224 186.87,204.111 186.87,204.746 185.6,206.016 185.6,207.037 186.484,207.921 186.484,210.312 187.83,211.658 190.043,211.658 v1(190.729,210.972)
  Bottom Layer w0.254: v1(190.729,210.972) 191.753,209.948 201.606,209.948 XP1.23@203.187,208.367
XP1-24: R37.2 XP1.24 | length 68.4
  Top Layer w0.254: R37.2@191.259,154.543 193.335,154.543 194.081,153.797 203.2,153.797 204.83,155.427 204.83,160.433 205.537,161.14 205.537,187.683 205.066,188.154 205.066,199.76 205.537,200.231 205.537,203.224 204.267,204.494 204.267,205.129 202.933,206.462 XP1.24@201.917,206.462
XP1-25: R51.2 XP1.25 | length 73
  Top Layer w0.254: R51.2@197.863,154.67 198.628,154.67 201.981,158.023 v1(201.981,159.004) ; v1(205.842,159.436) 206.07,159.664 206.07,188.158 205.57,188.658 205.57,197.747 v1(206.121,198.298)
  Bottom Layer w0.254: XP1.25@200.647,208.367 200.647,206.209 201.724,205.132 201.724,204.111 200.558,202.946 200.558,202.184 199.949,201.574 197.993,201.574 196.571,200.152 196.571,198.831 197.104,198.298 v1(206.121,198.298) ; v1(201.981,159.004) 202.413,159.436 v1(205.842,159.436)
XP1-26: R53.2 XP1.26 | length 55.4
  Top Layer w0.254: XP1.26@199.377,206.462 200.393,206.462 201.724,205.132 201.724,204.368 203.015,203.077 203.015,202.295 203.933,201.378 203.933,199.343 202.997,198.407 202.997,154.67 R53.2@202.308,154.67
XP1-27: R55.2 XP1.27 | length 65
  Top Layer w0.254: XP1.27@198.107,208.367 198.107,209.181 198.374,209.448 203.989,209.448 204.65,208.788 204.65,207.792 205.534,206.908 205.534,206.402 206.807,205.129 206.807,204.365 208.077,203.095 208.077,198.31 206.074,196.307 206.074,189.67 206.582,189.162 206.582,160.71 206.859,160.433 206.859,154.67 R55.2@207.388,154.67